# EAGLE board GPRSshield (EAGLE 5.10)
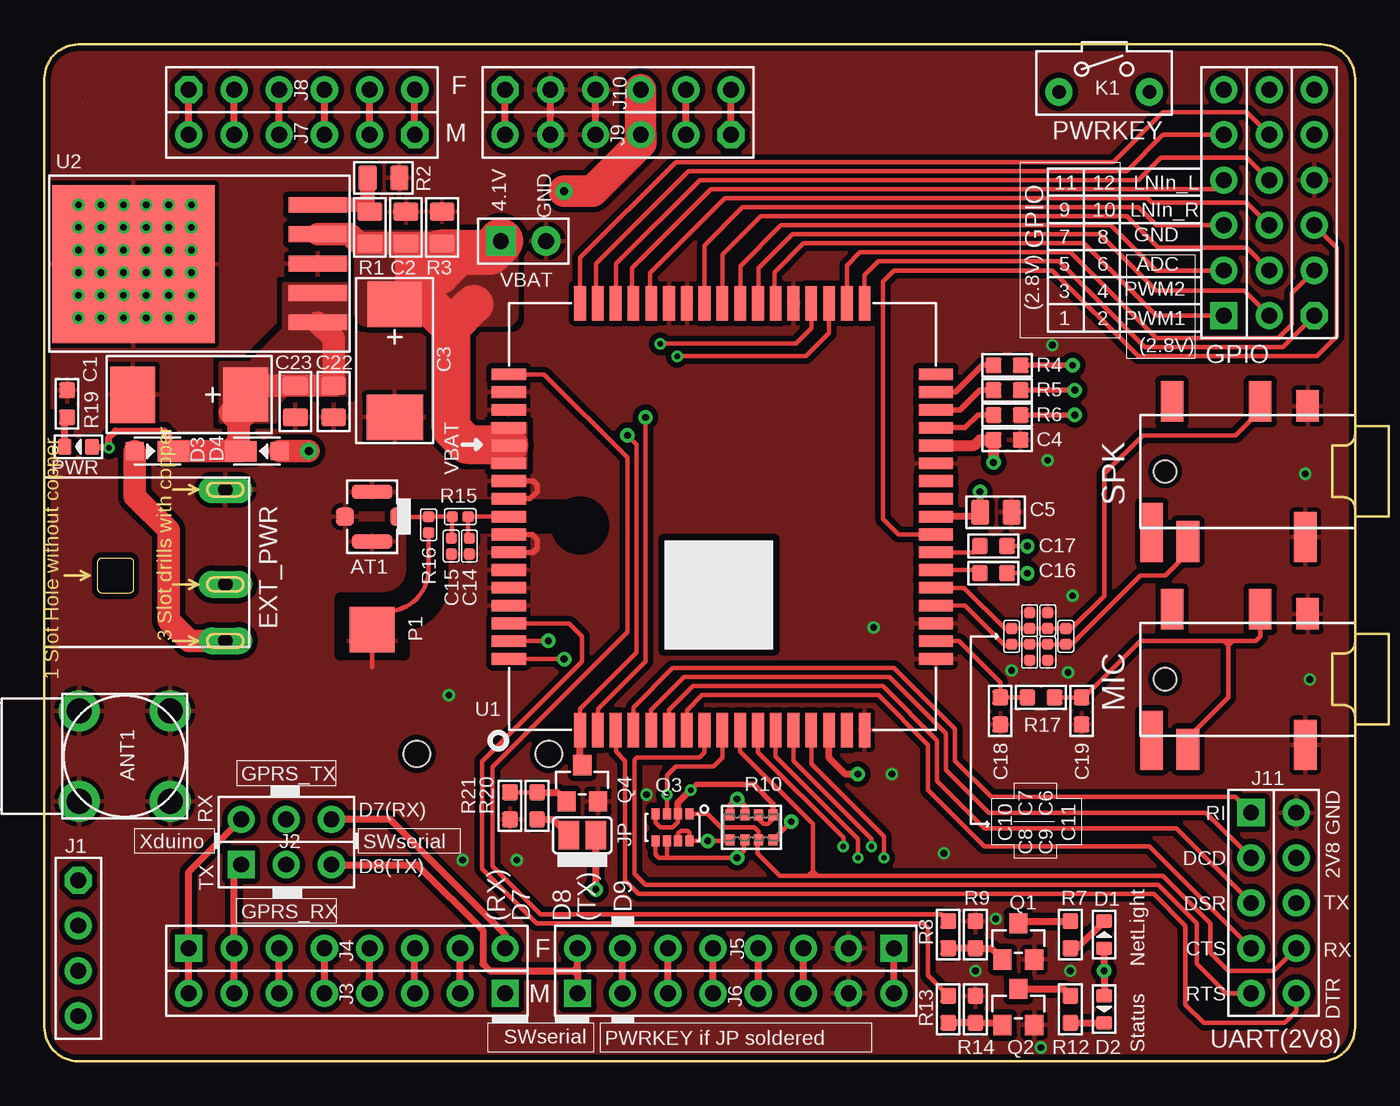
[diagram p0: board, top side]
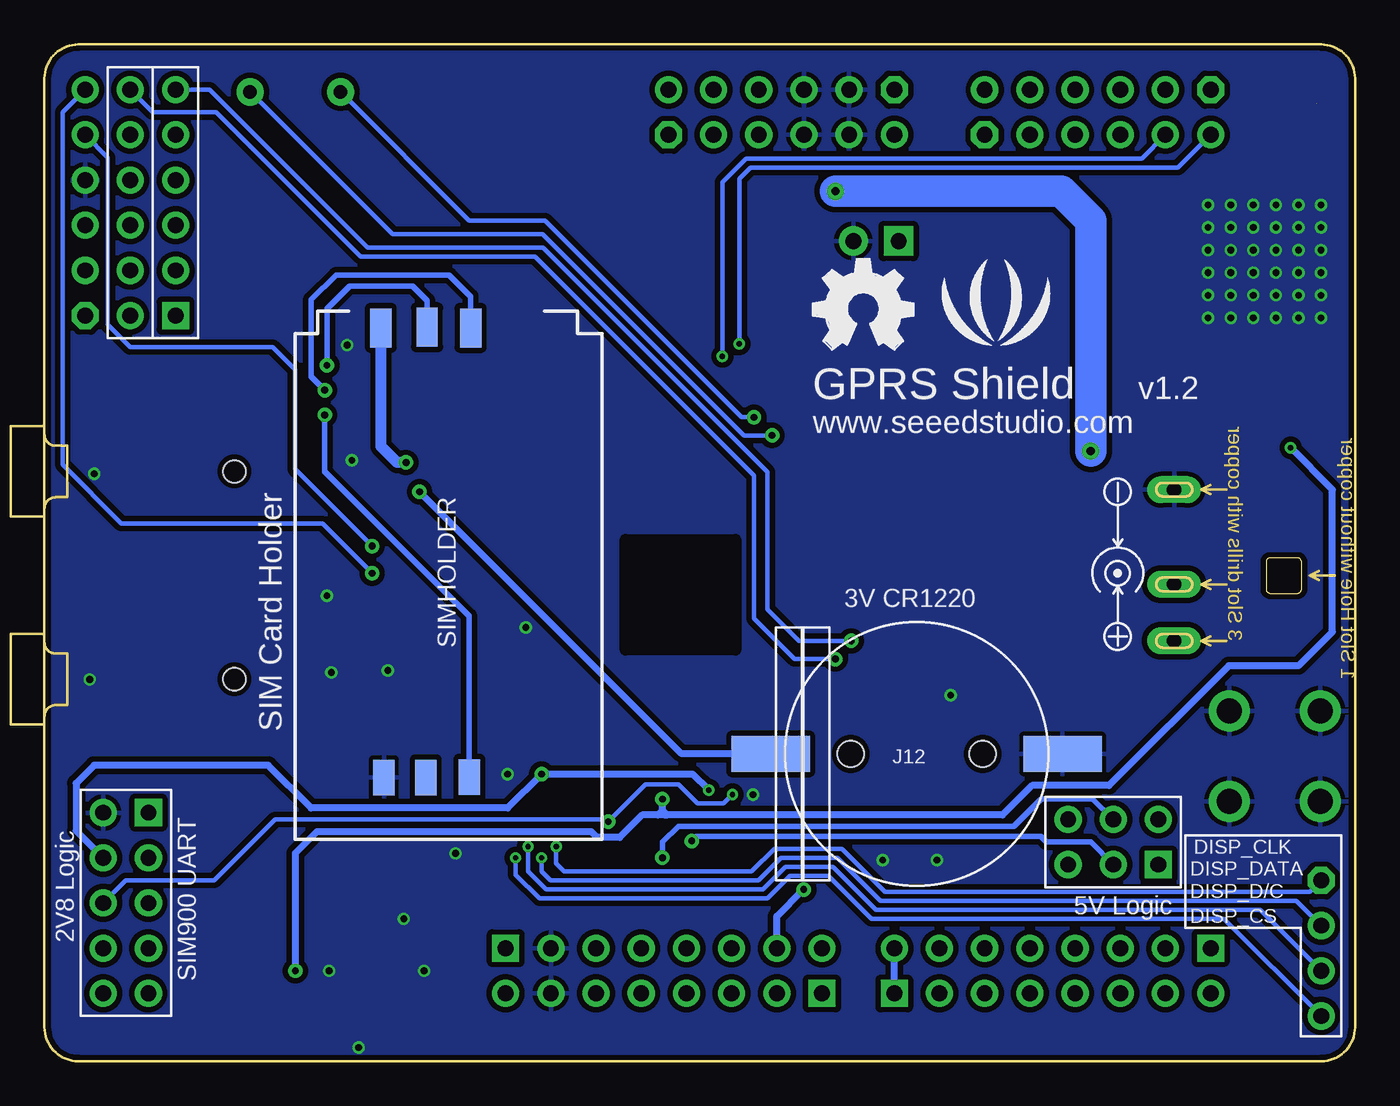
[diagram p1: board, bottom side, seen from below]

Size 73.66 x 57.15 mm. Coordinates in mm from the lower left corner, seen from the top.
Outline: 1.91,57.15 71.75,57.15 arc-90 73.66,55.24 73.66,1.91 arc-90 71.75,0 1.91,0 arc-90 0,1.91 0,55.24 arc-90 1.91,57.15
Copper layers (1*16): Top 0.035mm / dielectric 1.5mm / Bottom 0.035mm
Design rules "SeeedStudio_rule_no_angle_090911 *": minimum track width 6mil, minimum drill 12mil, track to track 6mil, track to pad 6mil, pad to pad 6mil, via to via 6mil, smd to smd 0mil, copper to edge 10mil, drill to drill 10mil, minimum pad ring 10mil, minimum via ring 6mil, stop-mask expansion 2mil, vias tented up to drill 100mil, thermal gap 10mil
Net classes: 0 default: width 0.203 mm, drill 0.305 mm, clearance 0.203 mm
tRestrict: area 34.8,23.1 to 41,29.3; area 35.6,41.9 to 35.7,43.3; area 25.5,37 to 26.7,37.2; area 25.7,32 to 26.5,32.1; area 25.7,28.1 to 26.5,28.2; area 25.7,27.1 to 26.5,27.2; area 25.7,26 to 26.5,26.2; area 25.7,29.1 to 26.4,29.2; 11 lines
bRestrict: area 34.8,23.1 to 41,29.3

## Footprints (pad centres in the part's own frame; a part is rotated, then mirrored left to right if it is on the bottom)
SMA-TO-IPX = drill 1.4 pad 2.3 round: P$1 -2.55,2.55; P$2 2.55,2.55; P$3 2.55,-2.55; P$4 -2.55,-2.55
U-FL = smd 1.016 x 1.016: D -1.524,0; GND3 1.524,0 | smd 2.286 x 0.762: GND1 0,1.397; GND2 0,-1.397
AVX_D = smd 2.54 x 3.048: + -3.175,0 | smd 2.54 x 3.175: - 3.175,0
0805 = smd 1.016 x 1.397: 1 -0.889,0; 2 0.889,0
0603 = smd 0.889 x 0.889: 1 -0.762,0; 2 0.762,0
0402 = smd 0.635 x 0.635: 1 -0.445,0; 2 0.445,0
D0603 = smd 0.762 x 0.889: + -0.762,0; - 0.762,0
D1005 = smd 1.016 x 1.016: + 1.27,0 | smd 1.778 x 1.143: - -0.889,0
DC-404 = drill 0.813 pad 1.524 long: + 3.175,10.16; - -5.334,10.16; CDN 0,10.16
4P-2.54 = drill 0.889 pad 1.524 octagon: 1 0,3.81 | drill 0.889 pad 1.524 round: 2 0,1.27; 3 0,-1.27; 4 0,-3.81
CK_2X3 = drill 0.889 pad 1.524 square: 1 -1.27,2.54 | drill 0.889 pad 1.524 round: 2 -1.27,0; 3 -1.27,-2.54; 4 1.27,-2.54; 5 1.27,0; 6 1.27,2.54
CK_1X8 = drill 0.889 pad 1.524 square: 1 0,8.89 | drill 0.889 pad 1.524 round: 2 0,6.35; 3 0,3.81; 4 0,1.27; 5 0,-1.27; 6 0,-3.81; 7 0,-6.35; 8 0,-8.89
CK_1X6 = drill 0.889 pad 1.524 octagon: 1 0,6.35 | drill 0.889 pad 1.524 round: 2 0,3.81; 3 0,1.27; 4 0,-1.27; 5 0,-3.81; 6 0,-6.35
2X5P-2.54-LEADED = drill 0.889 pad 1.524 square: 1 -1.27,5.08 | drill 0.889 pad 1.524 round: 2 -1.27,2.54; 3 -1.27,0; 4 -1.27,-2.54; 5 -1.27,-5.08; 6 1.27,-5.08; 7 1.27,-2.54; 8 1.27,0; 9 1.27,2.54; 10 1.27,5.08
CR1220 = smd 2 x 4.4: + 0,-8.2; - 0,8.2 | hole 1.5: 0,3.7; 0,-3.7
CK_2X6 = drill 0.889 pad 1.524 square: 1 -1.27,6.35 | drill 0.889 pad 1.524 round: 2 -1.27,3.81; 3 -1.27,1.27; 4 -1.27,-1.27; 5 -1.27,-3.81; 6 -1.27,-6.35; 7 1.27,-6.35; 8 1.27,-3.81; 9 1.27,-1.27; 10 1.27,1.27; 11 1.27,3.81; 12 1.27,6.35
2P-SMD-2X3.3 = smd 1.168 x 1.6: 1 -0.762,0; 2 0.762,0
BTN_5.0_RST = drill 0.762 pad 1.524 round: P$1 0,2.54; P$2 0,-2.54
3.5-SMD = smd 1.27 x 1.778: COM1 -4.572,3.683 | smd 1.27 x 2.794: COM2 -4.699,-3.683 | smd 1.27 x 2.286: L -11.303,-3.937; R -7.239,3.937; RS -12.192,3.937 | smd 1.27 x 3.302: LS -13.335,-3.429 | hole 1.27: -12.573,0
JP = smd 1.27 x 2.54: 1 -0.635,0; 2 0.635,0
SOT23@1 = smd 1.016 x 1.143: 1 -0.889,-1.016; 2 0.889,-1.016; 3 0,1.016
1206-8 = smd 0.457 x 0.635: 1 -0.953,-0.762; 2 -0.318,-0.762; 3 0.318,-0.762; 4 0.953,-0.762; 5 0.953,0.762; 6 0.318,0.762; 7 -0.318,0.762; 8 -0.953,0.762
R1206-8 = smd 0.508 x 0.635: 1 -1.206,-0.699; 2 -0.381,-0.699; 3 0.381,-0.699; 4 1.206,-0.699; 5 1.206,0.699; 6 0.381,0.699; 7 -0.381,0.699; 8 -1.206,0.699
SIMHOLDER3 = smd 2.2 x 1.2: 1 0.95,4.81; 2 0.91,7.41; 3 0.95,9.86 | smd 2 x 1.2: 4 26.2,9.78; 5 26.22,7.34; 6 26.22,4.98
SIM900 = smd 1.93 x 0.66: 1 -12,8; 2 -12,7; 3 -12,6; 4 -12,5; 5 -12,4; 6 -12,3; 7 -12,2; 8 -12,1; 9 -12,0; 10 -12,-1; 11 -12,-2; 12 -12,-3; 13 -12,-4; 14 -12,-5; 15 -12,-6; 16 -12,-7; 17 -12,-8; 35 12,-8; 36 12,-7; 37 12,-6; 38 12,-5; 39 12,-4; 40 12,-3; 41 12,-2; 42 12,-1; 43 12,0; 44 12,1; 45 12,2; 46 12,3; 47 12,4; 48 12,5; 49 12,6; 50 12,7; 51 12,8 | smd 0.66 x 1.93: 18 -8,-12; 19 -7,-12; 20 -6,-12; 21 -5,-12; 22 -4,-12; 23 -3,-12; 24 -2,-12; 25 -1,-12; 26 0,-12; 27 1,-12; 28 2,-12; 29 3,-12; 30 4,-12; 31 5,-12; 32 6,-12; 33 7,-12; 34 8,-12; 52 8,12; 53 7,12; 54 6,12; 55 5,12; 56 4,12; 57 3,12; 58 2,12; 59 1,12; 60 0,12; 61 -1,12; 62 -2,12; 63 -3,12; 64 -4,12; 65 -5,12; 66 -6,12; 67 -7,12; 68 -8,12
TO-263 = smd 3.302 x 0.889: 1 3.302,-3.302; 2 3.302,-1.651; 3 3.302,0; 4 3.302,1.651; 5 3.302,3.302 | smd 9.12 x 8.89: TAB -7.071,-0.03
CK_1*2 = drill 0.889 pad 1.651 square: 1 0,1.27 | drill 0.889 pad 1.651 round: 2 0,-1.27

## Placement (x,y rotation side)
ANT1  [SMA-TO-IPX]  4.51,17.14 270 top
AT1  U-FL  [U-FL]  18.41,30.61 180 top
C1  470u  [AVX_D]  8.13,37.47 180 top
C2  100n  [0805]  20.32,46.86 270 top
C3  470u  [AVX_D]  19.68,39.37 270 top
C4  100n  [0603]  54.1,34.92 0 top
C5  4.7U  [0805]  53.47,30.86 180 top
C6  33p  [0402]  56.39,24.77 270 top
C7  10p  [0402]  55.37,24.77 270 top
C8  10p  [0402]  55.37,22.99 270 top
C9  33p  [0402]  56.39,22.99 270 top
C10  10p  [0402]  54.36,23.88 270 top
C11  33p  [0402]  57.4,23.88 270 top
C14  [0402]  23.88,28.96 90 top
C15  [0402]  22.86,28.96 90 top
C16  2.2u  [0603]  53.34,27.43 180 top
C17  2.2u  [0603]  53.34,28.96 180 top
C18  33P  [0603]  53.72,19.68 270 top
C19  33p  [0603]  58.29,19.68 270 top
C22  10u  [0805]  16.26,37.08 90 top
C23  10u  [0805]  14.1,37.08 90 top
D1  green  [D0603]  59.56,7.11 90 top
D2  red  [D0603]  59.56,2.92 270 top
D3  MSS1P2U  [D1005]  6.35,34.29 180 top
D4  MSS1P2U  [D1005]  11.94,34.29 0 top
EXT_PWR  DC-044  [DC-404]  0,26.8 270 top
J1  [4P-2.54]  1.91,6.35 0 top
J2  CK_2X3_DD  [CK_2X3]  13.59,12.32 90 top
J3  8p male dowm  [CK_1X8]  17,3.81 270 top
J4  8p female up  [CK_1X8]  17,6.35 90 top
J5  8p female up  [CK_1X8]  38.85,6.35 270 top
J6  8p male dowm  [CK_1X8]  38.85,3.81 90 top
J7  6p male dowm  [CK_1X6]  14.46,52.07 270 top
J8  6p female up  [CK_1X6]  14.46,54.61 90 top
J9  6p male dowm  [CK_1X6]  32.24,52.07 270 top
J10  6p female up  [CK_1X6]  32.24,54.61 90 top
J11  [2X5P-2.54-LEADED]  69.09,8.89 0 top
J12  [CR1220]  24.64,17.27 270 bottom
J15  [CK_1X6]  71.37,48.26 180 top
J19  CK_2X6  [CK_2X6]  67.56,48.26 180 bottom
JP  [2P-SMD-2X3.3]  30.23,12.7 180 top
K1  BOTTON_1_DP  [BTN_5.0_RST]  59.56,54.48 90 top
LOGO1  LOGO-SEEEDSTUDIO-SILK  [LOGO_SILK]  20.19,41.91 0 bottom
LOGO2  LOGO-OSHW-FILLX0200-NT  [OSHW_FILLX200_NOTEXT]  30.48,40.01 0 bottom
MIC  [3.5-SMD]  75.56,21.46 0 top
P1  JP  [JP]  18.41,24.26 270 top
PWR  green  [D0603]  1.91,34.54 180 top
Q1  9013  [SOT23@1]  54.74,6.73 0 top
Q2  9013  [SOT23@1]  54.74,3.05 0 top
Q3  Si5902BDC  [1206-8]  35.3,13.14 180 top
Q4  9013  [SOT23@1]  30.23,15.62 0 top
R1  100k  [0805]  18.29,46.86 270 top
R2  43k  [0805]  19.05,49.66 180 top
R3  470R  [0805]  22.35,46.86 270 top
R4  22R  [0603]  54.1,39.12 180 top
R5  22R  [0603]  54.1,37.72 180 top
R6  22R  [0603]  54.1,36.32 0 top
R7  300R  [0603]  57.66,7.11 90 top
R8  4.7k  [0603]  50.8,7.11 270 top
R9  47k  [0603]  52.32,7.11 90 top
R10  10k  [R1206-8]  39.74,13.14 0 top
R12  300R  [0603]  57.66,2.92 90 top
R13  4.7k  [0603]  50.8,2.92 270 top
R14  47k  [0603]  52.32,2.92 90 top
R15  0R  [0402]  23.37,30.61 0 top
R16  [0402]  21.59,30.15 90 top
R17  68R  [0603]  56.01,20.45 0 top
R19  1k  [0603]  1.27,36.96 90 top
R20  4.7k  [0603]  27.69,14.35 90 top
R21  47k  [0603]  26.16,14.35 270 top
SIMHOLDER  SIMHOLDER3  [SIMHOLDER3]  59.56,42.16 270 bottom
SPK  [3.5-SMD]  75.56,33.15 0 top
U1  SIM900  [SIM900]  38.1,30.61 90 top
U2  MIC29302'BU'  [TO-263]  12.06,44.83 0 top
VBAT  HEADER_1X2_2.54  [CK_1*2]  26.92,46.1 90 top

## Library data of the parts
ANT1 EXT_PWR J1 J11 J12 MIC SPK = Connector
AT1 K1 = CPT_SMD
C1-C11 C14-C19 C22 C23 D1-D4 JP PWR Q1-Q4 R1-R10 R12-R17 R19-R21 = Discrete
J2-J10 J15 J19 VBAT = CONNECTER
LOGO1 LOGO2 = logo
P1 = mySeeed
SIMHOLDER = SparkFun2
U1 U2 = ICs_v54

## Nets
ADC: J15.3 U1.25
CTS: J11.4 U1.7
D9: J5.7 J6.2 JP.1
DCD: J11.2 U1.5
DISP_CLK: J1.1 U1.11
DISP_CS: J1.4 U1.14
DISP_D/C: J1.3 U1.13
DISP_DATA: J1.2 U1.12
DSR: J11.3 U1.6
GND: ANT1.P$1 ANT1.P$2 ANT1.P$3 ANT1.P$4 AT1.GND1 AT1.GND2 AT1.GND3 C1.- C2.1 C3.- C4.2 C5.1 C6.1 C7.1 C8.2 C9.2 C14.1 C15.1 C18.2 C19.2 C22.1 C23.1 EXT_PWR.- J5.2 J6.7 J9.4 J9.5 J10.2 J10.3 J11.10 J12.- J15.4 MIC.COM1 MIC.COM2 P1.2 Q1.2 Q2.2 Q4.2 R2.1 R3.1 R9.2 R14.2 R19.2 R21.2 SIMHOLDER.6 SPK.COM1 SPK.COM2 U1.17 U1.18 U1.20 U1.29 U1.39 U1.45 U1.46 U1.53 U1.54 U1.58 U1.59 U1.61 U1.62 U1.63 U1.64 U1.65 U2.3 U2.TAB VBAT.2
GPIO1: J19.1 U1.40
GPIO2: J19.12 U1.41
GPIO3: J19.2 U1.42
GPIO4: J19.11 U1.43
GPIO5: J19.3 U1.44
GPIO6: J19.10 U1.47
GPIO7: J19.4 U1.48
GPIO8: J19.9 U1.49
GPIO9: J19.5 U1.50
GPIO10: J19.8 U1.51
GPIO11: J19.6 U1.67
GPIO12: J19.7 U1.68
HRXD: J2.2 Q3.7 Q3.8 R10.1
HTXD: J2.5 Q3.5 Q3.6 R10.2
LDBG_RX: U1.28
LDBG_TX: U1.27
LDTR: J11.6 U1.3
LINEIN_L: C17.2 U1.24
LINEIN_R: C16.2 U1.23
LRTS: J11.5 U1.8
LRXD: J11.7 Q3.1 R10.3 U1.10
LTXD: J11.8 Q3.3 R10.4 U1.9
MRXD: J2.1 J3.7 J4.2
MTXD: J2.6 J3.8 J4.1
N$1: C14.2 R15.2 U1.60
N$2: R1.1 R2.2 U2.5
N$3: Q1.3 R7.2
N$4: R6.2 SIMHOLDER.4
N$5: R5.1 SIMHOLDER.3
N$6: R4.1 SIMHOLDER.2
N$7: D1.- R7.1
N$8: Q1.1 R8.2 R9.1
N$10: R8.1 U1.52
N$11: K1.P$1 U1.2
N$13: C18.1 R17.1 U1.19
N$14: JP.2 R20.1
N$15: C8.1 C9.1 C10.2 C11.2 SPK.L U1.21
N$16: Q2.3 R12.2
N$17: D2.- R12.1
N$18: Q2.1 R13.2 R14.1
N$19: C6.2 C7.2 C10.1 C11.1 SPK.R U1.22
N$20: R13.1 U1.66
N$21: AT1.D C15.2 R15.1 R16.2
N$22: P1.1 R16.1
N$23: C16.1 J15.6
N$24: J3.6 J4.3
N$25: J3.5 J4.4
N$26: J3.4 J4.5
N$27: J3.3 J4.6
N$28: J3.2 J4.7
N$29: C17.1 J15.5
N$30: C19.1 MIC.L MIC.R R17.2
N$32: J5.6 J6.3
N$33: J5.5 J6.4
N$34: J5.4 J6.5
N$35: J5.3 J6.6
N$36: Q4.1 R20.2 R21.1
N$37: J5.1 J6.8
N$41: J7.4 J8.3
N$42: J7.3 J8.4
N$43: J7.2 J8.5
N$44: J7.1 J8.6
N$45: J9.6 J10.1
N$49: J9.2 J10.5
N$50: J9.1 J10.6
N$53: PWR.- R19.1
PWM1: J15.1 U1.35
PWM2: J15.2 U1.36
PWRKEY: K1.P$2 Q4.3 U1.1
RI: J11.1 U1.4
SCL: J7.6 J8.1 U1.38
SDA: J7.5 J8.2 U1.37
SIM_CLK: R5.2 U1.32
SIM_DATA: R6.1 U1.31
SIM_RST: R4.2 U1.33
SIM_VDD: C4.1 SIMHOLDER.1 U1.30
SRXD: J2.3 J5.8 J6.1
STXD: J2.4 J3.1 J4.8
VBAT: C2.2 C3.+ R1.2 R3.2 U1.55 U1.56 U1.57 U2.4 VBAT.1
VBOARD: D4.+ J9.3 J10.4
VDD_EXT: J11.9 Q3.2 Q3.4 R10.5 R10.6 U1.15
VEXT: D3.+ EXT_PWR.+
VIN: C1.+ C22.2 C23.2 D1.+ D2.+ D3.- D4.- PWR.+ R10.7 R10.8 U2.1 U2.2
VRTC: C5.2 J12.+ U1.26

## Tracks (layer width: path | path; a pad name or v marks a point on that pad's centre or on a via)
ADC
  Top 0.254: U1.25 47.99,29.61 47.12,30.48 47.12,43.81 47.75,44.45 56.64,44.45 61.47,39.62 71.5,39.62 72.64,40.77 72.64,45.72 J15.3
CTS
  Top 0.254: U1.7 36.1,19.72 36.96,20.57 46.86,20.57 49.66,17.78 49.66,15.24 52.83,12.06 62.1,12.06 J11.4
D9  (via drill 0.38 pad 0.81)
  Top 0.406: J6.2 J5.7 | v30.99,9.65 JP.1
  Bottom 0.406: J5.7 32.5,8.14 v30.99,9.65
DCD
  Top 0.254: U1.5 34.1,19.75 35.94,21.59 47.5,21.59 50.67,18.41 50.67,16.38 53.09,13.97 65.28,13.97 J11.2
DISP_CLK  (via drill 0.3 pad 0.64)
  Top 0.254: U1.11 40.1,17.37 44.9,12.57 v44.9,12.06
  Bottom 0.254: J1.1 2.54,9.53 26.42,9.53 28.83,11.94 32.64,11.94 33.91,10.67 44.45,10.67 44.9,11.11 v44.9,12.06
DISP_CS  (via drill 0.3 pad 0.64)
  Top 0.254: U1.14 43.1,16.72 47.18,12.64 v47.18,11.43
  Bottom 0.254: v47.18,11.43 47.18,10.48 45.85,9.14 33.02,9.14 31.75,10.41 29.59,10.41 27.18,8 7.37,8 J1.4
DISP_D/C  (via drill 0.3 pad 0.64)
  Top 0.254: U1.13 42.1,16.89 46.48,12.51 v46.48,12.06
  Bottom 0.254: v46.48,12.06 46.48,10.67 45.47,9.65 33.27,9.65 32,10.92 29.34,10.92 26.92,8.51 5.33,8.51 J1.3
DISP_DATA  (via drill 0.3 pad 0.64)
  Top 0.254: U1.12 41.1,17.13 45.72,12.51 v45.72,11.43
  Bottom 0.254: J1.2 3.3,9.02 26.67,9.02 29.08,11.43 32.26,11.43 33.53,10.16 45.21,10.16 45.72,10.67 v45.72,11.43
DSR
  Top 0.254: U1.6 35.1,19.73 36.45,21.08 47.12,21.08 50.16,18.03 50.16,15.75 52.83,13.08 63.63,13.08 J11.3
GND  (via drill 0.38)  (1 unrouted)
  Top 0.254: 18.41,22.15 P1.2
  Top 0.305: U1.62 27.46,28.61 27.69,28.83 27.69,29.34 27.43,29.59 26.12,29.59 U1.61 | U1.58 27.46,32.61 27.69,32.38 27.69,32 27.3,31.62 26.12,31.62 U1.59
  Top 0.406: J9.4 J10.3 | J9.5 J10.2
  other vias: 46.61,24.38 57.78,26.16 54.36,21.97 71.12,21.46 47.62,16.13 70.87,33.02 56.64,40.26 8.26,41.78 8.26,43.05 8.26,44.32 8.26,45.59 8.26,46.86 8.26,48.13 6.99,48.13 5.71,48.13 4.45,48.13 3.17,48.13 1.91,48.13 1.91,46.86 1.91,45.59 1.91,44.32 1.91,43.05 1.91,41.78 4.45,46.86 4.45,45.59 4.45,44.32 4.45,43.05 4.45,41.78 3.17,46.86 3.17,45.59 3.17,44.32 3.17,43.05 3.17,41.78 5.71,46.86 5.71,45.59 5.71,44.32 5.71,43.05 5.71,41.78 6.99,46.86 6.99,45.59 6.99,44.32 6.99,43.05 6.99,41.78 56.39,33.78 57.53,21.84 33.85,14.99 22.73,20.57 50.55,11.68 26.54,11.3 53.47,8 57.66,5.08 52.32,5.08 56.01,0.76 23.5,11.3
  pour Bottom: -25.91,34.16 -24.38,34.16 -24.38,32.89 -25.91,32.89
  pour Top: -25.91,34.16 -24.38,34.16 -24.38,32.89 -25.91,32.89
  pour Bottom (isolate 0.305): -5.46,57.28 75.82,57.28 75.82,-0.51 -5.46,-0.51
  pour Top (isolate 0.305, rank 6): -5.46,57.28 75.82,57.28 75.82,-0.51 -5.46,-0.51
GPIO1
  Top 0.254: U1.40 41.02,42.69 41.02,44.32 42.67,45.97 58.42,45.97 62.48,41.91 J19.1
GPIO2
  Top 0.254: U1.41 40.13,42.64 40.13,44.58 42.04,46.48 59.31,46.48 62.48,43.31 67.44,43.31 J19.12
GPIO3
  Top 0.254: U1.42 39.12,42.62 39.12,44.7 41.4,46.99 59.94,46.99 62.48,44.45 J19.2
GPIO4
  Top 0.254: U1.43 38.1,45.34 40.26,47.5 60.83,47.5 62.61,45.72 67.56,45.72 J19.11
GPIO5
  Top 0.254: U1.44 37.08,42.62 37.08,45.85 39.24,48.01 61.47,48.01 62.48,46.99 J19.3
GPIO6
  Top 0.254: 34.04,42.54 34.04,44.3 38.25,48.51 61.98,48.51 62.23,48.26 67.56,48.26 J19.10 | 34.04,42.54 34.04,42.42 | U1.47 34.04,42.54
GPIO7
  Top 0.254: U1.48 33.02,42.69 33.02,44.58 37.47,49.02 65.79,49.02 J19.4
GPIO8
  Top 0.254: U1.49 32.13,42.64 32.13,44.83 36.83,49.53 61.47,49.53 62.74,50.8 67.56,50.8 J19.9
GPIO9
  Top 0.254: U1.50 30.99,42.72 | 30.99,42.72 | 30.99,42.72 30.99,44.83 36.19,50.04 60.83,50.04 62.87,52.07 J19.5
GPIO10
  Top 0.254: U1.51 30.1,45.15 35.49,50.55 60.07,50.55 62.87,53.34 67.56,53.34 J19.8
GPIO11  (via drill 0.38 pad 0.81)
  Top 0.254: U1.67 28.31,23.61 v28.32,23.62
  Bottom 0.254: v28.32,23.62 31.24,23.62 33.02,25.4 33.02,33.12 45.62,45.72 55.5,45.72 64.39,54.61 J19.6
GPIO12  (via drill 0.38 pad 0.81)
  Top 0.254: U1.68 v29.21,22.61
  Bottom 0.254: v29.21,22.61 31.5,22.61 33.78,24.89 33.78,32.91 46.08,45.21 55.88,45.21 64.01,53.34 67.56,53.34 J19.7
HRXD  (via drill 0.38 pad 0.81)
  Top 0.254: Q3.8 v37.27,12.38 38.47,12.38 R10.1 | Q3.8 36.25,12.44 | Q3.7 35.62,12.8 35.77,12.95 36.13,12.95 36.26,12.83 Q3.8
  Bottom 0.305: J2.2 14.86,12.32 17.34,12.32 17.65,12.64 37.02,12.64 v37.27,12.38
HTXD  (via drill 0.38 pad 0.81)
  Top 0.254: R10.2 39.31,12.39 39.31,11.81 v38.92,11.43 35.12,11.43 | 35.12,11.43 34.86,11.43 | 34.86,11.43 34.55,11.43 34.34,11.63 Q3.5 | 34.98,11.55 Q3.6 | 34.86,11.43 34.98,11.55 | 34.98,11.55 35,11.55 35.12,11.43
  Bottom 0.305: v38.92,11.43 38.92,12.32 38.04,13.21 19.18,13.21 17.63,14.75 14.75,14.75 J2.5
LDTR
  Top 0.254: J11.6 70.36,2.79 69.72,2.16 65.15,2.16 64.14,3.17 64.14,7.62 62.36,9.4 33.4,9.4 32.64,10.16 32.64,16.89 32.13,17.4 32.13,18.58 U1.3
LINEIN_L
  Top 0.254: U1.24 52.23,28.61 C17.2
LINEIN_R
  Top 0.254: U1.23 52.4,27.61 C16.2
LRTS
  Top 0.254: J11.5 66.42,3.81 64.77,5.46 64.77,7.75 62.61,9.91 33.78,9.91 33.16,10.53 33.16,16.93 33.31,17.08 36.82,17.08 37.1,17.36 U1.8
LRXD
  Top 0.254: R10.3 40.12,12.92 39.9,13.14 38.02,13.14 37.26,13.9 Q3.1 | 40.07,12.39 40.07,11.68 41.34,10.41 42.93,10.41 | J11.7 69.09,5.08 66.55,5.08 65.53,6.1 65.53,7.75 62.87,10.41 43.43,10.41 | 42.93,10.41 43.18,10.41 | 43.18,10.41 43.43,10.41 | U1.10 39.1,17.41 43.18,13.34 43.18,10.67 | 43.18,10.41 43.18,10.67 | 43.18,10.67 43.43,10.41 | 42.93,10.41 43.18,10.67
  Top 0.305: 40.18,12.38 R10.3 40.07,12.39
LTXD  (via drill 0.3 pad 0.64, 0.38 pad 0.81)
  Top 0.254: v41.97,13.47 | R10.4 | v41.97,13.47 R10.4 | U1.9 38.1,17.08 37.59,16.57 35.5,16.57 34.99,16.07 v34.99,14.99 34.99,13.91 Q3.3
  Top 0.305: R10.4
  Bottom 0.254: J11.8 69.09,10.16 64.14,10.16 60.71,13.59 42.09,13.59 v41.97,13.47 39.88,15.56 38.04,15.56 36.96,14.48 35.5,14.48 v34.99,14.99
MRXD
  Top 0.406: J3.7 J4.2 10.65,10.65 J2.1
MTXD
  Top 0.406: J3.8 J4.1 8.11,10.65 J2.6
N$1
  Top 0.254: U1.60 R15.2 23.81,29.46 C14.2
N$2
  Top 0.813: U2.5 17.91,48.13 R1.1 18.16,47.88 R2.2
N$3
  Top 0.406: R7.2 54.86,7.87 Q1.3
N$4  (via drill 0.38 pad 0.81)
  Top 0.305: v57.91,36.32 R6.2
  Bottom 0.305: v57.91,36.32 57.91,33.15 49.78,25.02 SIMHOLDER.4
N$5  (via drill 0.38 pad 0.81)
  Top 0.305: v57.91,37.72 R5.1
  Bottom 0.305: SIMHOLDER.3 49.7,42.97 50.93,44.2 57.28,44.2 58.67,42.8 58.67,38.48 v57.91,37.72
N$6  (via drill 0.38 pad 0.81)
  Top 0.305: v57.78,39.12 R4.1
  Bottom 0.305: SIMHOLDER.2 52.15,42.76 52.96,43.56 56.52,43.56 57.78,42.29 v57.78,39.12
N$7
  Top 0.406: R7.1 58.04,6.35 D1.-
N$8
  Top 0.406: R8.2 R9.1 53.21,6.35 Q1.1
N$10
  Top 0.254: U1.52 28.08,38.61 32.77,33.92 32.77,24.13 25.19,16.55 25.19,10.95 27.89,8.26 50.42,8.26 R8.1
N$11  (via drill 0.38 pad 0.81)
  Top 0.254: U1.2 31.11,18.62 31.11,19.81 33.78,22.48 v33.78,36.2
  Bottom 0.254: K1.P$1 49.78,47.24 45.53,47.24 34.48,36.2 v33.78,36.2
N$13
  Top 0.254: U1.19 51.4,23.61 53.72,21.28 C18.1 R17.1
N$14
  Top 0.406: R20.1 28.57,13.59 JP.2
N$15
  Top 0.254: U1.21 51.74,25.61 53.98,23.37 54.29,23.37 C10.2 C8.1 C9.1 C11.2 57.72,23.43 61.59,27.3 62.99,27.3 64.26,28.57 SPK.L
N$16
  Top 0.406: Q2.3 57.28,4.06 R12.2
N$17
  Top 0.406: R12.1 D2.-
N$18
  Top 0.406: R13.2 R14.1 53.72,2.16 Q2.1
N$19
  Top 0.254: U1.22 51.69,26.61 53.98,24.32 C10.1 C7.2 C6.2 C11.1 57.72,24.32 59.56,26.16 59.56,33.02 61.72,35.18 66.93,35.18 68.33,36.58 SPK.R
N$20
  Top 0.254: U1.66 29.5,24.61 30.23,23.88 30.23,22.48 24.59,16.84 24.59,10.81 27.65,7.75 49.4,7.75 49.66,7.49 49.66,4.83 R13.1
N$21
  Top 0.254: AT1.D arc91 19.95,30.59 R16.2 arc-91 21.6,30.61 R15.1 22.92,29.46 C15.2
N$22
  Top 0.254: R16.1 21.59,27.56 arc-90 19.05,25.27 18.8,25.27 arc90 P1.1
N$23  (via drill 0.38 pad 0.81)
  Top 0.254: C16.1 v55.24,27.43
  Bottom 0.254: J15.6 72.64,53.34 72.64,33.53 69.34,30.23 58.04,30.23 v55.24,27.43
N$24
  Top 0.406: J3.6 J4.3
N$25
  Top 0.406: J3.5 J4.4
N$26
  Top 0.406: J3.4 J4.5
N$27
  Top 0.406: J3.3 J4.6
N$28
  Top 0.406: J3.2 J4.7
N$29  (via drill 0.38 pad 0.81)
  Top 0.254: C17.1 v55.24,28.96
  Bottom 0.254: J15.5 70.1,50.8 70.1,41.4 68.83,40.13 60.83,40.13 59.56,38.86 59.56,33.27 v55.24,28.96
N$30
  Top 0.254: R17.2 C19.1 58.42,20.45 61.59,23.62 66.29,23.62 | 66.29,23.62 66.55,23.62 | 66.55,23.62 66.55,23.37 | MIC.L 64.26,18.16 66.55,20.45 66.55,23.37 | MIC.L 64.14,17.4 64.26,17.4 MIC.L | 66.55,23.62 66.8,23.62 | 66.8,23.62 68.07,23.62 68.33,23.88 MIC.R | 66.29,23.62 66.55,23.37 | 66.55,23.37 66.8,23.62
N$32
  Top 0.406: J6.3 J5.6
N$33
  Top 0.406: J6.4 J5.5
N$34
  Top 0.406: J6.5 J5.4
N$35
  Top 0.406: J6.6 J5.3
N$36
  Top 0.254: R21.1 R20.2
  Top 0.406: R20.2 28.83,15.11 Q4.1
N$37
  Top 0.406: J6.8 J5.1
N$41
  Top 0.406: J7.4 J8.3
N$42
  Top 0.406: J7.3 J8.4
N$43
  Top 0.406: J7.2 J8.5
N$44
  Top 0.406: J7.1 J8.6
N$45
  Top 0.406: J9.6 J10.1
N$49
  Top 0.406: J9.2 J10.5
N$50
  Top 0.406: J9.1 J10.6
N$53
  Top 0.406: PWR.- 1.14,36.07 R19.1
PWM1
  Top 0.254: U1.35 46.1,44.2 46.86,44.96 57.02,44.96 61.85,40.13 69.6,40.13 J15.1
PWM2
  Top 0.254: U1.36 45.1,44.72 45.85,45.47 57.66,45.47 62.48,40.64 69.34,40.64 70.1,41.4 70.1,43.18 J15.2
PWRKEY  (via drill 0.38 pad 0.81)
  Top 0.254: U1.1 30.1,19.81 33.27,22.99 33.27,34.67 v32.77,35.18
  Top 0.406: U1.1 30.1,16.76 Q4.3
  Bottom 0.254: K1.P$2 54.1,46.48 45.66,46.48 34.35,35.18 v32.77,35.18
RI
  Top 0.254: U1.4 33.1,19.89 35.31,22.1 47.75,22.1 51.18,18.67 51.18,16.89 53.21,14.86 66.93,14.86 J11.1
SCL  (via drill 0.3 pad 0.64)
  Top 0.254: U1.38 43.1,41.2 42.23,40.32 v34.61,40.32
  Top 0.406: J7.6 J8.1
  Bottom 0.254: v34.61,40.32 34.61,49.59 33.97,50.23 9.96,50.23 J7.6
SDA  (via drill 0.3 pad 0.64)
  Top 0.254: U1.37 44.1,40.92 42.8,39.62 v35.56,39.62
  Top 0.406: J7.5 J8.2
  Bottom 0.254: v35.56,39.62 35.56,49.4 34.23,50.74 11.99,50.74 J7.5
SIM_CLK
  Top 0.305: U1.32 51.47,36.61 52.58,37.72 R5.2
SIM_DATA
  Top 0.305: U1.31 51.74,35.61 52.45,36.32 R6.1
SIM_RST
  Top 0.305: U1.33 51.2,37.61 52.7,39.12 R4.2
SIM_VDD  (via drill 0.38 pad 0.81)
  Top 0.61: U1.30 52.26,34.61 52.58,34.92 C4.1 v53.34,33.66
  Bottom 0.61: SIMHOLDER.1 54.75,34.56 53.85,33.66 v53.34,33.66
SRXD
  Top 0.305: 29.97,5.33 29.72,5.08 29.97,4.83
  Top 0.406: 29.96,6.34 J5.8 29.96,5.08 | J2.3 20.95,11.05 24.64,7.37 24.64,5.46 25.02,5.08 29.72,5.08 29.96,5.08 | 29.96,5.08 J6.1
STXD
  Top 0.406: J4.8 25.89,7.13 19.43,13.59 J2.4
  Bottom 0.406: J3.1 J4.8
VBAT
  Top 1.27: C2.2 R3.2 | C2.2 R1.2 17.65,45.97 17.14,46.48 U2.4 | C2.2 20.32,42.42 20.7,42.8 | 20.45,45.21 20.45,45.85 C2.2
  Top 2.184: 20.57,42.93 20.7,42.8 20.74,42.84 | 22.86,41.27 20.95,43.18 | U1.56 26.04,34.67 23.75,34.67 22.86,35.56 22.86,41.27 | 22.86,41.27 24.13,42.55
  Top 2.54: VBAT.1 25.02,45.47 23.24,45.47 | 23.24,45.47 22.23,45.47 22.1,45.34 | 22.1,44.32 23.24,45.47
  pour Top (isolate 0.254, no thermals): 17.53,46.61 26.54,46.61 26.54,42.04 arc-90 25.91,41.4 18.16,41.4 arc-90 17.53,42.04
  pour Top (no thermals): 25.15,35.81 27.05,35.81 27.05,33.4 25.15,33.4
VBOARD  (via drill 0.46 pad 0.97)
  Top 1.27: D4.+ v14.86,34.29
  Top 1.778: J10.4 J9.3 33.53,52.06 33.53,51.63 30.8,48.9 v29.21,48.9
  Bottom 1.778: v14.86,34.29 14.86,47.24 16.51,48.9 v29.21,48.9
VDD_EXT  (via drill 0.3 pad 0.64, 0.38 pad 0.81)
  Top 0.254: Q3.4 34.34,13.43 34.64,13.14 35.3,13.14 35.62,13.46 Q3.2 | R10.6 40.12,13.63 40.41,13.34 40.67,13.34 40.95,13.61 R10.5 | Q3.2
  Top 0.305: R10.5 40.96,14.46 39.87,15.56 36.64,15.56 v36.32,15.24
  Top 0.406: U1.15 44.1,17.05 45.02,16.13 v45.72,16.13 | Q3.2 35.62,14.53 v36.32,15.24
  Bottom 0.406: J11.9 71.88,12.95 71.88,15.62 70.87,16.64 61.09,16.64 58.67,14.22 47.62,14.22 v45.72,16.13 37.21,16.13 v36.32,15.24
VEXT
  Top 1.27: D3.+ 5.08,31.75 6.99,29.84 6.99,24.77 8.13,23.62 EXT_PWR.+
VIN  (via drill 0.3 pad 0.64, 0.38 pad 0.81)
  Top 0.406: R10.8 38.54,14.34 v38.92,14.73 39.36,14.3 R10.7 | D2.+ v59.56,5.08 D1.+ | 6.99,34.92 6.99,34.54 D3.- | 6.99,34.92 6.99,35.18 6.73,35.43 4,35.43 3.62,35.05 v3.62,34.48 2.73,34.48 PWR.+ | 6.99,34.92 7.24,34.67
  Top 1.27: D3.- 10.41,34.29 | 10.41,34.29 D4.- | 10.92,35.94 10.92,37.08 C1.+ 11.81,37.97 C23.2 C22.2 16.26,40.64 U2.1 | 10.92,35.94 10.41,36.45 | 10.92,35.94 11.56,36.58 | 10.92,35.94 10.92,34.8 10.41,34.29
  Bottom 0.406: 38.67,13.84 38.8,13.84 | 38.8,13.84 39.18,13.84 | 39.18,13.84 40.07,13.84 41.34,12.57 42.61,12.57 42.93,12.89 58.36,12.89 59.56,11.68 v59.56,5.08 | 38.92,14.1 38.92,13.97 38.8,13.84 | 38.92,14.1 39.18,13.84 | 38.92,14.1 v38.92,14.73 | 38.67,13.84 38.92,14.1 | v3.62,34.48 1.27,32.13 1.27,24.13 3.17,22.23 7.1,22.23 13.83,15.49 18.16,15.49 19.81,13.84 38.67,13.84
  pour Top (isolate 0.254, rank 2, no thermals): 13.46,43.69 17.02,43.69 17.02,37.47 13.59,37.47 12.95,36.83 12.95,35.94 9.91,35.94 9.91,39.24 11.56,39.24 13.46,41.15
VRTC  (via drill 0.38 pad 0.81)
  Top 0.406: v52.58,32 C5.2 52.32,30.61 U1.26
  Bottom 0.406: J12.+ 37.85,17.27 v52.58,32

## Text on the board
tPlace: F | M | PWRKEY | 4.1V | GND | 11 | 12 | LNIn_L | GPIO | 9 | 10 | LNIn_R | 7 | 8 | GND | (2.8V) | 5 | 6 | ADC | 3 | 4 | PWM2 | 1 | 2 | PWM1 | (2.8V) | GPIO | VBAT | GPRS_TX | RX | GND | D7(RX) | RI | Xduino | SWserial | DCD | 2V8 | TX | D8(TX) | DSR | TX | GPRS_RX | (RX) | D7 | D8 | (TX) | D9 | F | CTS | RX | NetLight | DTR | M | RTS | SWserial | UART(2V8) | PWRKEY if JP soldered | Status
bPlace: v1.2 | GPRS Shield | www.seeedstudio.com | 3V CR1220 | SIMHOLDER | SIM Card Holder | SIM900 UART | 2V8 Logic | DISP_CLK | DISP_DATA | DISP_D/C | 5V Logic | DISP_CS